# Altium PCB AUX_SteeringWheel_v5.PcbDoc
Units mil, origin at the board's own origin, x right, y up, seen from the top; angles counter-clockwise.
Board outline 6882 x 5290 mil, 2 copper layers (Top Layer, Bottom Layer); 43 components, 42 nets, 261 pads, 56 vias.
Unrouted connection lines stored in the file: 1.
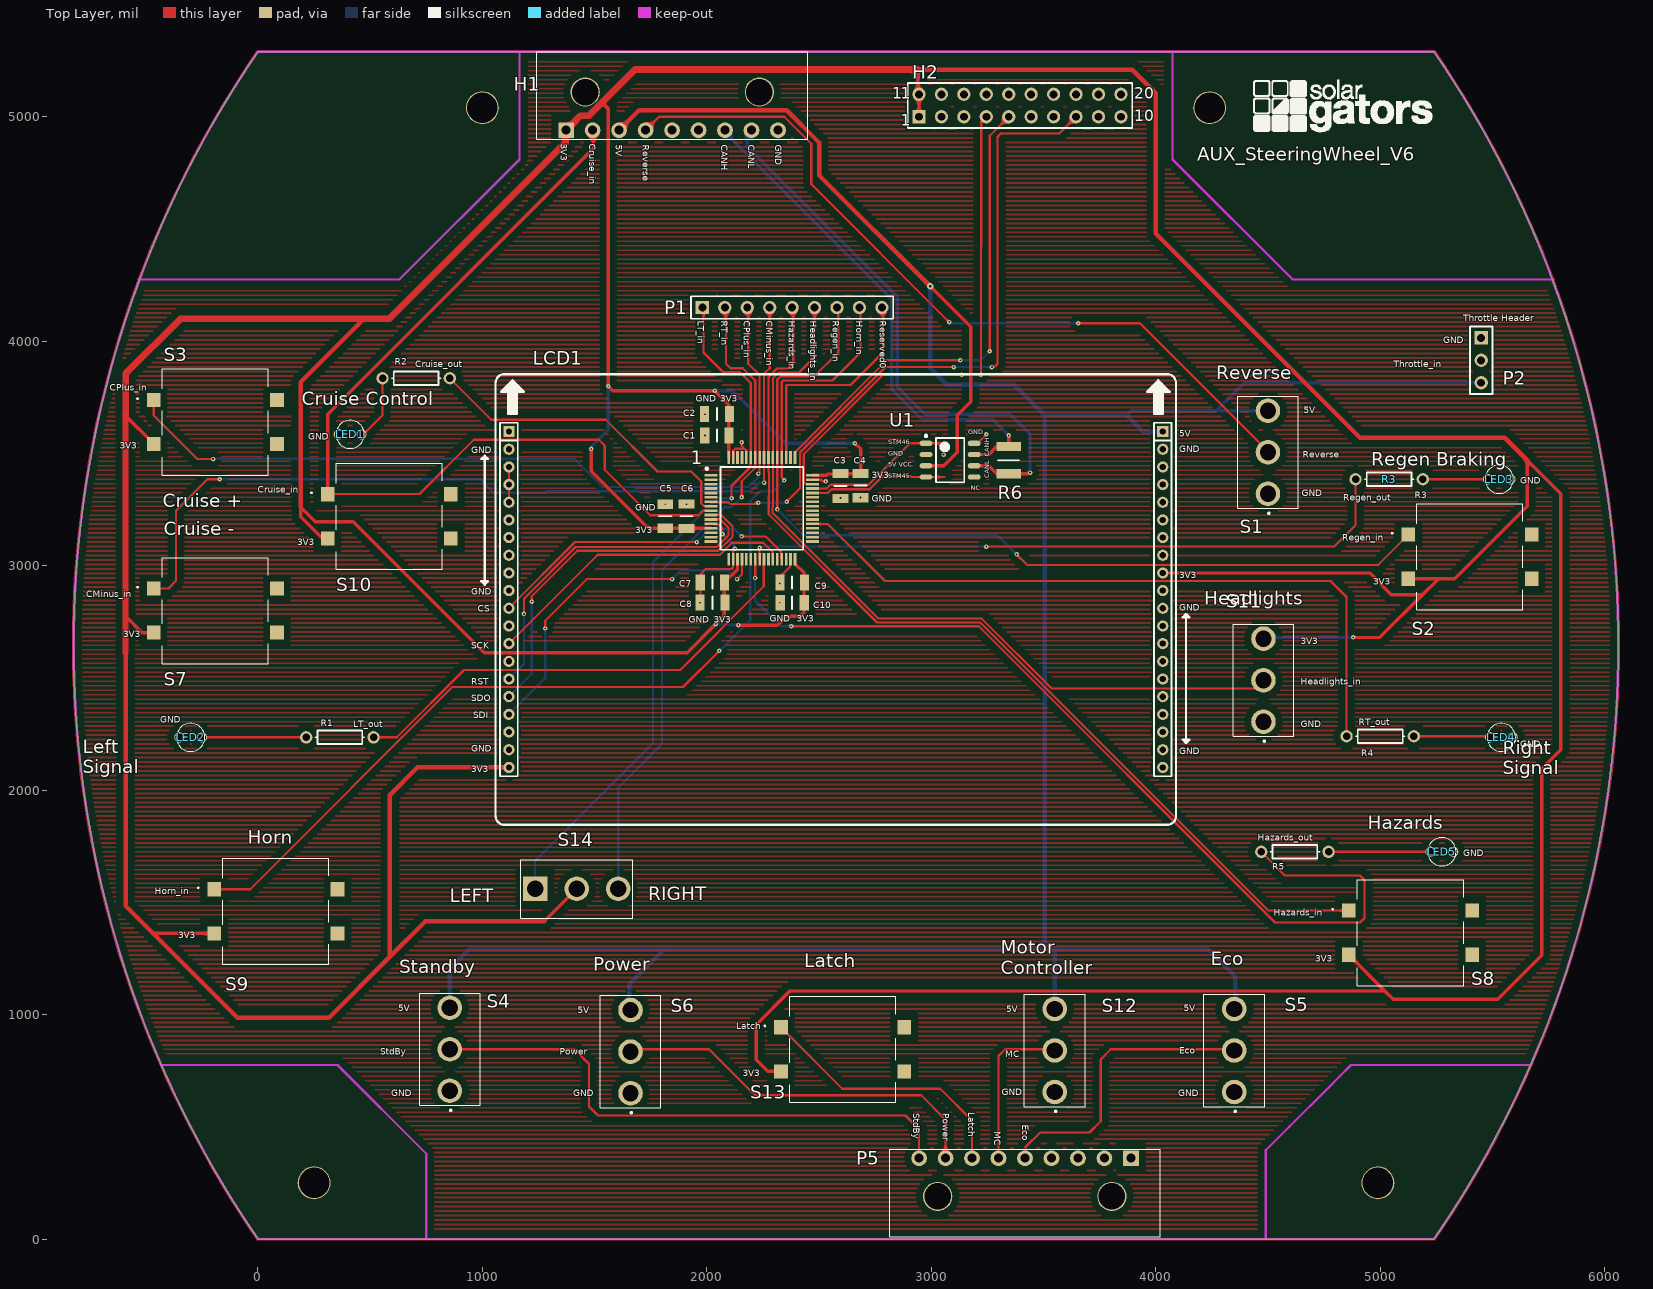
[diagram p0: Top Layer view]
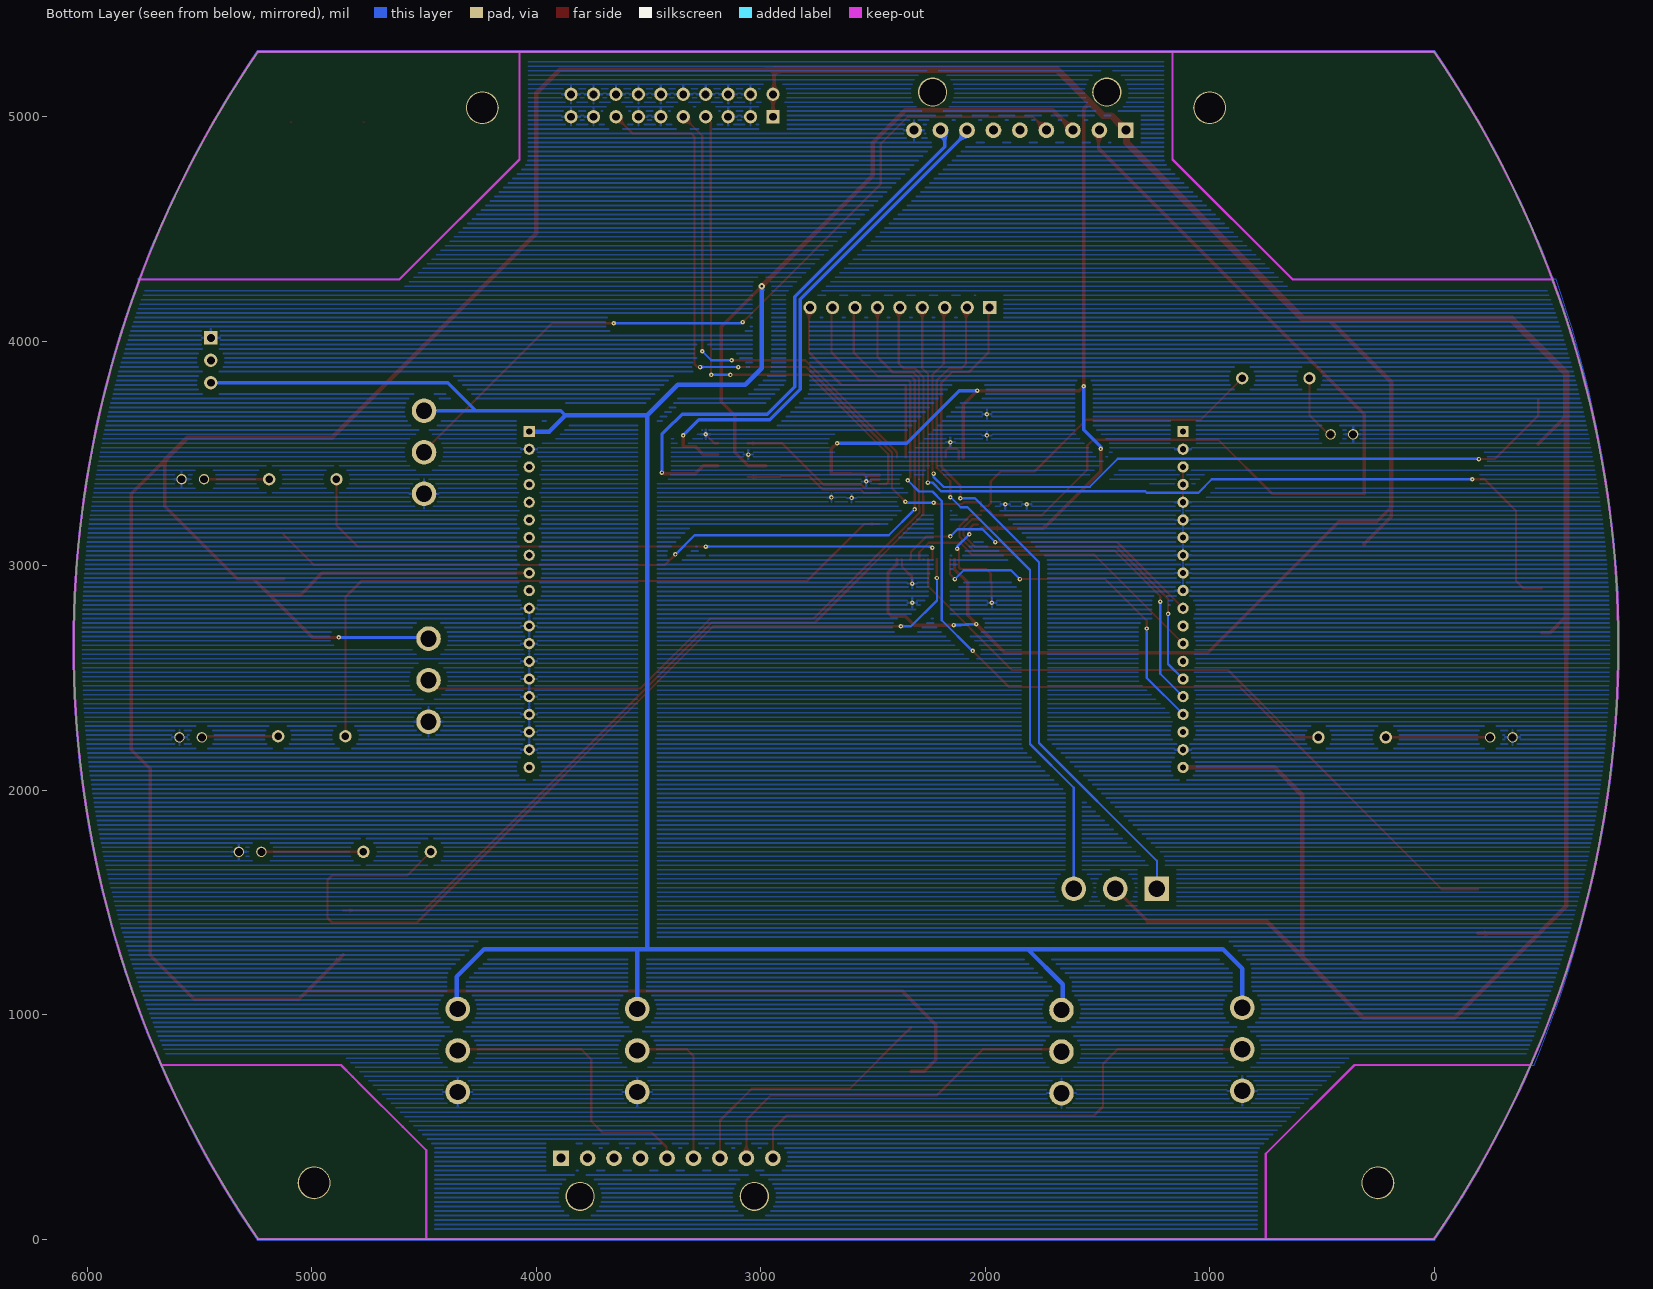
[diagram p1: Bottom Layer view, seen from below]

## Layer stack, top to bottom
Top Solder: solder mask 1, SM-001, Dk 4
Top Layer: signal copper 1.4
Dielectric 1: dielectric 12.6, FR-4, Dk 4.8
Bottom Layer: signal copper 1.4
Bottom Solder: solder mask 1, SM-001, Dk 4

## Board outline
0,0 5240,0 5239.83,0.12 ccw(c1391,2645) 5239.83,5289.88 5240,5290 0.25,5290 ccw(c3849,2645)

## Design rules (kind name [scope] priority, off if disabled: settings)
Clearance "Transciever Clearance" [InComponent('U1')] p1: gap=7 ignorepadtopadclearanceinfootprint=FALSE except(6: Arc-SMDPad Arc-THPad Track-SMDPad Track-THPad; 25: SMDPad-Fill SMDPad-Poly SMDPad-Region)
Clearance "General Clearance" [Not InComponent('1') and Not InComponent('U1') vs Not InComponent('1') and Not InComponent('U1')] p2: gap=7 ignorepadtopadclearanceinfootprint=TRUE except(6: Arc-SMDPad Arc-THPad Track-SMDPad Track-THPad; 15: Via-Fill Via-Poly Via-Region; 30: Arc-Fill Arc-Poly Arc-Region Track-Fill Track-Poly Track-Region SMDPad-Fill SMDPad-Poly SMDPad-Region THPad-Fill THPad-Poly THPad-Region Fill-Fill Fill-Poly Fill-Region Poly-Poly Poly-Region Region-Region)
Clearance "STM Clearance" [InComponent('1')] p3: gap=7 ignorepadtopadclearanceinfootprint=FALSE except(6: Arc-SMDPad Arc-THPad Track-SMDPad Track-THPad; 15: Via-Fill Via-Poly Via-Region)
ComponentClearance [InComponent('U2')] p1: gap=0 collisioncheckmode=3 verticalgap=10 showdistances=FALSE
DiffPairsRouting [All] p1: maxlimit=10 minlimit=10 mostfreqgap=10 toplayer_minwidth=15 toplayer_maxwidth=15 toplayer_prefwidth=15 bottomlayer_minwidth=15 bottomlayer_maxwidth=15 bottomlayer_prefwidth=15 maxuncoupledlength=500
Height [All] p1: minheight=0 maxheight=2000 prefheight=500
HoleSize [All] p1: absolutevalues=TRUE maxlimit=200 minlimit=1 maxpercent=80.000 minpercent=20.000
PolygonConnect [InNet('GND') vs InNet('GND')] p1: connectstyle=Relief reliefconductorwidth=10 reliefentries=4 polygonreliefangle="90 Angle" airgapwidth=10
RoutingVias [All] p1: holewidth=28 width=50 viastyle="Through Hole" minholewidth=28 minwidth=50 maxholewidth=28 maxwidth=50
SolderMaskExpansion [All] p1: expansion=4
Width [All] p1: maxlimit=30 minlimit=10 preferedwidth=10 bottomlayer_maxwidth=20 minimp=50.000000 maximp=50.000000 favimp=50.000000
26 further rules are at their usual default settings.

## Classes and differential pairs
differential pair CAN: +CAN_P -CAN_N

## Components (designator, comment, footprint, x,y, rotation, side; value= is the part's Value field where it differs from the comment)
1 "STM32F072RBT6" QFP50P1200X1200X160-64N 2245,3255 r0 top
C1 "Cap Semi" CAPC3216X90N 2045,3580 r180 top value=4.7uF
C2 "Cap Semi" CAPC3216X88N 2045,3675 r180 top value=100nF
C3 "Cap Semi" CAPC3216X88N 2595,3355 r90 top value=100nF
C4 "Cap Semi" CAPC3216X90N 2685,3356.85 r90 top value=4.7uF
C5 "Cap Semi" CAPC3216X90N 1815,3220 r90 top value=4.7uF
C6 "Cap Semi" CAPC3216X88N 1910,3220 r90 top value=100nF
C7 "Cap Semi" CAPC3216X90N 2025,2925 r180 top value=4.7uF
C8 "Cap Semi" CAPC3216X88N 2025,2835 r180 top value=100nF
C9 "Cap Semi" CAPC3216X88N 2380,2925 r0 top value=100nF
C10 "Cap Semi" CAPC3216X90N 2380,2835 r0 top value=4.7uF
H1 "9-Pin Connector" Rt_Angle_9-Pin 1242.5,4900 r0 top
H2 "Header 10X2A" HDR2X10_CEN 2945,5000 r0 top
LCD1 "HY28B" HY28B 1120,3597.36 r0 top locked
LED1 "SML-LXIL0603SIC-TR" "LED thru hole" 460.59,3585 r90 top locked
LED2 "SML-LXIL0603SIC-TR" "LED thru hole" -250,2235 r90 top locked
LED3 "SML-LXIL0603SIC-TR" "LED thru hole" 5480,3385 r270 top locked
LED4 "SML-LXIL0603SIC-TR" "LED thru hole" 5490,2235 r270 top locked
LED5 "SML-LXIL0603SIC-TR" "LED thru hole" 5225,1725 r270 top locked
P1 "Header 9" HDR1X9 1980,4150 r0 top
P2 "Header 3" HDR1X3 5450,4015 r270 top
P5 "Header 9" Rt_Angle_9-Pin 4020,400 r180 top locked
R1 "Res1" AXIAL-0.3 365,2235 r180 top value=1K
R2 "Res1" AXIAL-0.3 705,3835 r180 top value=1K
R3 "Res1" AXIAL-0.3 5040,3385 r0 top value=1K
R4 "Res1" AXIAL-0.3 5000,2240 r0 top value=1K
R5 "Res1" AXIAL-0.3 4620,1725 r0 top value=1K
R6 "SG73P2ETTD1200F" RESC3226X70N 3345,3470 r270 top
S1 "Switch" 100SP1T1B4M2QE 4500,3505 r90 top
S2 "101-0624-EV" 1010624EV 5400,3040 r0 top
S3 "101-0624-EV" 1010624EV -190,3640 r0 top locked
S4 "Switch" 100SP1T1B4M2QE 855,845.04 r90 top
S5 "Switch" 100SP1T1B4M2QE 4350,840 r90 top
S6 "Switch" 100SP1T1B4M2QE 1660,835 r90 top
S7 "101-0624-EV" 1010624EV -190,2800 r0 top locked
S8 "101-0624-EV" 1010624EV 5135,1365 r0 top
S9 "101-0624-EV" 1010624EV 80,1460 r0 top locked
S10 "101-0624-EV" 1010624EV 585,3220 r0 top locked
S11 "Switch" 100SP1T1B4M2QE 4480,2490 r90 top
S12 "Switch" 100SP1T1B4M2QE 3550,840.04 r90 top
S13 "101-0624-EV" 1010624EV 2605,845 r0 top locked
S14 "2M1-SP3-T1-B1-M2QE" 2M1SP3T1B1M2QE 1234.96,1560 r0 top
U1 "IC CAN TRANSCEIVER" "CAN TRANSCEIVER" 3083.61,3470 r0 top

## Footprints (in the part's own frame and the unit in brackets; to place one, negate y for a bottom-side part, rotate by r counter-clockwise, add the part's x,y. Pads: shape width x height; smd on the part's side, far side on the other; paste and mask are expansions set on the pad)
2M1SP3T1B1M2QE [mm]
  rect 2.775x2.775 hole 1.85: 1(0,0)
  round 2.775 hole 1.85: 2(4.7,0) 3(9.4,0)
  silkscreen extent -1.65,-3.3 11.05,3.3, body extent -1.65,-3.3 11.05,3.3, height 28.3
100SP1T1B4M2QE [mm]
  round 2.775 hole 1.85: 1(-4.7,0) 2(0,0) 3(4.7,0)
  silkscreen extent -7,-3.43 6.35,3.43, body extent -6.35,-3.43 6.35,3.43, height 28.1
1010624EV [mm]
  rect 1.55x1.6 smd: T1(-6.975,2.5) T2(6.975,2.5) T3(-6.975,-2.5) T4(6.975,-2.5)
  silkscreen extent -8.85,-6 6,6
AXIAL-0.3 [mm] "Axial Device, Thru-Hole; 2 Leads; 0.3 in Pin Spacing"
  round 1.4 hole 0.85: 1(-3.81,0) 2(3.81,0)
  silkscreen extent -2.77,-0.76 2.77,0.76
"CAN TRANSCEIVER" [mm] "SOIC, 8-Leads, Body 4.91x3.90mm, Pitch 1.27mm, IPC Medium Density"
  oval 1.45x0.6 smd: 1(-2.725,1.905) 2(-2.725,0.635) 3(-2.725,-0.635) 4(-2.725,-1.905) 5(2.725,-1.905) 6(2.725,-0.635) 7(2.725,0.635) 8(2.725,1.905)
  silkscreen extent -2.85,-2.5 1.6,2.88, body extent -2,-2.5 2,2.5, height 1.75
CAPC3216X88N [mm]
  rect 1.02x1.82 smd: 1(-1.4,0) 2(1.4,0)
  silkscreen extent 0,-0.7 0,0.7, body extent -1.6,-0.8 1.6,0.8, height 0.88
CAPC3216X90N [mm]
  rect 1.06x1.78 smd: 1(-1.36,0) 2(1.36,0)
  silkscreen extent 0,-0.7 0,0.7, body extent -1.6,-0.8 1.6,0.8, height 0.9
HDR1X3 [mm] "Connector; Header; 3 Position"
  rect 1.5x1.5 hole 0.9: 1(0,0)
  round 1.5 hole 0.9: 2(2.54,0) 3(5.08,0)
  silkscreen extent -1.27,-1.27 6.35,1.27
HDR1X9 [mm] "Connector; Header; 9 Position"
  rect 1.5x1.5 hole 0.9: 1(0,0)
  round 1.5 hole 0.9: 2(2.54,0) 3(5.08,0) 4(7.62,0) 5(10.16,0) 6(12.7,0) 7(15.24,0) 8(17.78,0) 9(20.32,0)
  silkscreen extent -1.27,-1.27 21.59,1.27
HDR2X10_CEN [mm] "Connector; Header; 10x2 Position"
  rect 1.5x1.5 hole 0.9: 1(0,0)
  round 1.5 hole 0.9: 2(2.54,0) 3(5.08,0) 4(7.62,0) 5(10.16,0) 6(12.7,0) 7(15.24,0) 8(17.78,0) 9(20.32,0) 10(22.86,0) 11(0,2.54) 12(2.54,2.54) 13(5.08,2.54) 14(7.62,2.54) 15(10.16,2.54) 16(12.7,2.54) 17(15.24,2.54) 18(17.78,2.54) 19(20.32,2.54) 20(22.86,2.54)
  silkscreen extent -1.27,-1.27 24.13,3.81
HY28B [mm] "2.8\" LCD"
  rect 1.27x1.27 hole 0.7: 1(-0.051,0) 21(73.949,0)
  round 1.27 hole 0.7: 2(-0.051,-2) 3(-0.051,-4) 4(-0.051,-6) 5(-0.051,-8) 6(-0.051,-10) 7(-0.051,-12) 8(-0.051,-14) 9(-0.051,-16) 10(-0.051,-18) 11(-0.051,-20) 12(-0.051,-22) 13(-0.051,-24) 14(-0.051,-26) 15(-0.051,-28) 16(-0.051,-30) 17(-0.051,-32) 18(-0.051,-34) 19(-0.051,-36) 20(-0.051,-38) 22(73.949,-2) 23(73.949,-4) 24(73.949,-6) 25(73.949,-8) 26(73.949,-10) 27(73.949,-12) 28(73.949,-14) 29(73.949,-16) 30(73.949,-18) 31(73.949,-20) 32(73.949,-22) 33(73.949,-24) 34(73.949,-26) 35(73.949,-28) 36(73.949,-30) 37(73.949,-32) 38(73.949,-34) 39(73.949,-36) 40(73.949,-38)
  silkscreen extent -1.55,-44.5 75.45,6.5
"LED thru hole" [mil] "WP710A10QBC/D or WP7113LVBC/D"
  round 46 hole 35.43: 1(0,0) 2(0,100)
  silkscreen extent -63,-13 63,113
QFP50P1200X1200X160-64N [mm]
  rect 1.45x0.3 smd: 1(-5.75,3.75) 2(-5.75,3.25) 3(-5.75,2.75) 4(-5.75,2.25) 5(-5.75,1.75) 6(-5.75,1.25) 7(-5.75,0.75) 8(-5.75,0.25) 9(-5.75,-0.25) 10(-5.75,-0.75) 11(-5.75,-1.25) 12(-5.75,-1.75) 13(-5.75,-2.25) 14(-5.75,-2.75) 15(-5.75,-3.25) 16(-5.75,-3.75) 33(5.75,-3.75) 34(5.75,-3.25) 35(5.75,-2.75) 36(5.75,-2.25) 37(5.75,-1.75) 38(5.75,-1.25) 39(5.75,-0.75) 40(5.75,-0.25) 41(5.75,0.25) 42(5.75,0.75) 43(5.75,1.25) 44(5.75,1.75) 45(5.75,2.25) 46(5.75,2.75) 47(5.75,3.25) 48(5.75,3.75)
  rect 0.3x1.45 smd: 17(-3.75,-5.75) 18(-3.25,-5.75) 19(-2.75,-5.75) 20(-2.25,-5.75) 21(-1.75,-5.75) 22(-1.25,-5.75) 23(-0.75,-5.75) 24(-0.25,-5.75) 25(0.25,-5.75) 26(0.75,-5.75) 27(1.25,-5.75) 28(1.75,-5.75) 29(2.25,-5.75) 30(2.75,-5.75) 31(3.25,-5.75) 32(3.75,-5.75) 49(3.75,5.75) 50(3.25,5.75) 51(2.75,5.75) 52(2.25,5.75) 53(1.75,5.75) 54(1.25,5.75) 55(0.75,5.75) 56(0.25,5.75) 57(-0.25,5.75) 58(-0.75,5.75) 59(-1.25,5.75) 60(-1.75,5.75) 61(-2.25,5.75) 62(-2.75,5.75) 63(-3.25,5.75) 64(-3.75,5.75)
  silkscreen extent -6.35,-4.68 4.68,4.68, body extent -6,-6 6,6, height 1.6
RESC3226X70N [mm]
  rect 1.05x2.8 smd: 1(-1.55,0) 2(1.55,0)
  silkscreen extent 0,-1.2 0,1.2, body extent -1.6,-1.3 1.6,1.3, height 0.7
Rt_Angle_9-Pin [mil]
  rect 70x70 hole 40: 1(130.5,40)
  round 70 hole 40: 2(248.5,40) 3(366.5,40) 4(484.5,40) 5(602.5,40) 6(720.5,40) 7(838.5,40) 8(956.5,40) 9(1074.5,40)
  round 130 hole 118: P$1(215.5,210) P$2(991.5,210)
  silkscreen extent 0,0 1206,390

## Part data
1: "Integrated Circuit", Manufacturer_Name=STMicroelectronics, Mouser Part Number=511-STM32F072RBT6, Datasheet Link=https://componentsearchengine.com/Datasheets/1/STM32F072RBT6.pdf, Height=1.6mm, Manufacturer_Part_Number=STM32F072RBT6, Mouser Price/Stock=https://www.mouser.com/Search/Refine.aspx?Keyword=511-STM32F072RBT6
C1 C4 C5 C7 C10: library part 1206X475K250CT, "1206X475K250CT", Manufacturer_Name="Walsin Technology Corporation", Datasheet Link=https://ms.componentsearchengine.com/Datasheets/2/1206X475K250CT.pdf, Height=0.9mm, Manufacturer_Part_Number=1206X475K250CT
C2 C3 C6 C8 C9: library part C1206C104K5RAC7411, "C1206C104K5RAC7411", Manufacturer_Name=Kemet, Datasheet Link=https://ms.componentsearchengine.com/Datasheets/1/C1206C104K5RAC7411.pdf, Height=0.88mm, Manufacturer_Part_Number=C1206C104K5RAC7411
H2: "Header, 10-Pin, Dual row", LatestRevisionDate=17-Jul-2002, LatestRevisionNote="Re-released for DXP Platform.", Publisher="Altium Limited"
LCD1: "2.8\" LCD"
LED1 LED2 LED4: "Cruise", Manufacturer_Name=Lumex, Mouser2 Part Number=696-SMLLXIL0603SICTR, ComponentLink1Description=Red, ComponentLink1URL=https://www.mouser.com/ProductDetail/Lumex/SML-LXIL0603SIC-TR?qs=sGAEpiMZZMseGfSY3csMkdgyOOAg6kv2wBhnt1KKZ0Ir1Jo46E1V3Q%3D%3D, ComponentLink2Description=Green, ComponentLink2URL=https://www.mouser.com/ProductDetail/Lumex/SML-LXIL0603UPGCTR?qs=sGAEpiMZZMseGfSY3csMkdgyOOAg6kv2sRjHcnaWQfp%2F9Np9qK5zmw%3D%3D, ComponentLink3Description=Blue, ComponentLink3URL=https://www.mouser.com/ProductDetail/Lumex/SML-LXIL0603USBCTR?qs=sGAEpiMZZMseGfSY3csMkdgyOOAg6kv2YTCj%2FpdrnHQXx1e9lymIRQ%3D%3D, Datasheet Link=https://componentsearchengine.com/Datasheets/1/SML-LXIL0603SIC-TR.pdf, Height=1.15mm, Manufacturer_Part_Number=SML-LXIL0603SIC-TR, Mouser2 Price/Stock=https://www.mouser.com/Search/Refine.aspx?Keyword=696-SMLLXIL0603SICTR
LED3: "Headlights", Manufacturer_Name=Lumex, Mouser2 Part Number=696-SMLLXIL0603SICTR, ComponentLink1Description=Red, ComponentLink1URL=https://www.mouser.com/ProductDetail/Lumex/SML-LXIL0603SIC-TR?qs=sGAEpiMZZMseGfSY3csMkdgyOOAg6kv2wBhnt1KKZ0Ir1Jo46E1V3Q%3D%3D, ComponentLink2Description=Green, ComponentLink2URL=https://www.mouser.com/ProductDetail/Lumex/SML-LXIL0603UPGCTR?qs=sGAEpiMZZMseGfSY3csMkdgyOOAg6kv2sRjHcnaWQfp%2F9Np9qK5zmw%3D%3D, ComponentLink3Description=Blue, ComponentLink3URL=https://www.mouser.com/ProductDetail/Lumex/SML-LXIL0603USBCTR?qs=sGAEpiMZZMseGfSY3csMkdgyOOAg6kv2YTCj%2FpdrnHQXx1e9lymIRQ%3D%3D, Datasheet Link=https://componentsearchengine.com/Datasheets/1/SML-LXIL0603SIC-TR.pdf, Height=1.15mm, Manufacturer_Part_Number=SML-LXIL0603SIC-TR, Mouser2 Price/Stock=https://www.mouser.com/Search/Refine.aspx?Keyword=696-SMLLXIL0603SICTR
LED5: "Hazards", Manufacturer_Name=Lumex, Mouser2 Part Number=696-SMLLXIL0603SICTR, ComponentLink1Description=Red, ComponentLink1URL=https://www.mouser.com/ProductDetail/Lumex/SML-LXIL0603SIC-TR?qs=sGAEpiMZZMseGfSY3csMkdgyOOAg6kv2wBhnt1KKZ0Ir1Jo46E1V3Q%3D%3D, ComponentLink2Description=Green, ComponentLink2URL=https://www.mouser.com/ProductDetail/Lumex/SML-LXIL0603UPGCTR?qs=sGAEpiMZZMseGfSY3csMkdgyOOAg6kv2sRjHcnaWQfp%2F9Np9qK5zmw%3D%3D, ComponentLink3Description=Blue, ComponentLink3URL=https://www.mouser.com/ProductDetail/Lumex/SML-LXIL0603USBCTR?qs=sGAEpiMZZMseGfSY3csMkdgyOOAg6kv2YTCj%2FpdrnHQXx1e9lymIRQ%3D%3D, Datasheet Link=https://componentsearchengine.com/Datasheets/1/SML-LXIL0603SIC-TR.pdf, Height=1.15mm, Manufacturer_Part_Number=SML-LXIL0603SIC-TR, Mouser2 Price/Stock=https://www.mouser.com/Search/Refine.aspx?Keyword=696-SMLLXIL0603SICTR
P1 P5: "Header, 9-Pin", LatestRevisionDate=17-Jul-2002, LatestRevisionNote="Re-released for DXP Platform.", Publisher="Altium Limited"
P2: "Header, 3-Pin", LatestRevisionDate=17-Jul-2002, LatestRevisionNote="Re-released for DXP Platform.", Publisher="Altium Limited"
R1 R2 R3 R4 R5: "Resistor", LatestRevisionDate=17-Jul-2002, LatestRevisionNote="Re-released for DXP Platform.", PackageDescription="Axial Device, Thru-Hole; 2 Leads; 0.3 in Pin Spacing", PackageReference=AXIAL-0.3, Published=8-Jun-2000, Publisher="Altium Limited"
R6: "Resistor", Manufacturer_Name="KOA Speer", Datasheet Link=https://ms.componentsearchengine.com/Datasheets/1/SG73P2ETTD1200F.pdf, Height=0.7mm, Manufacturer_Part_Number=SG73P2ETTD1200F
S1 S4 S5 S6 S11 S12: library part 100SP1T1B1M2QEH, Manufacturer_Name=E-Switch, Mouser2 Part Number=612-100-A1121, Datasheet Link=https://componentsearchengine.com//100SP1T1B1M2QEH.pdf, Height=28mm, Manufacturer_Part_Number=100SP1T1B1M2QEH, Mouser2 Price/Stock=https://www.mouser.com/Search/Refine.aspx?Keyword=612-100-A1121
S2 S3 S7 S8 S9 S10 S13: "Switch", Manufacturer_Name="Mountain Switch", Datasheet Link=https://componentsearchengine.com/Datasheets/1/101-0624-EV.pdf, Height=7.3mm, Manufacturer_Part_Number=101-0624-EV, Mouser Part Number=101-0624-EV, Mouser Price/Stock=https://www.mouser.com/Search/Refine.aspx?Keyword=101-0624-EV
S14: "Switch", Manufacturer_Name="Carling Technologies", Mouser2 Part Number=691-2M1-SP3-T1B1M2QE, Datasheet Link=https://www.carlingtech.com/sites/default/files/documents/Carling-MTS-2M-Series.pdf, Height=28.2mm, Manufacturer_Part_Number=2M1-SP3-T1-B1-M2QE, Mouser2 Price/Stock=https://www.mouser.com/Search/Refine.aspx?Keyword=691-2M1-SP3-T1B1M2QE
U1: library part "CAN TRANSCEIVER"

## Free pads (board coordinates)
  round 146 hole 136: P$3(1000,5040) P$4(4240,5040) P$5(4990,250) P$6(250,250)

## Via types
v1: diameter 20, hole 8, Top Layer to Bottom Layer, 49 vias
v2: diameter 20, hole 7.87, Top Layer to Bottom Layer, 6 vias
v3: diameter 30, hole 10, Top Layer to Bottom Layer, 1 vias

## Nets (pads, with @x,y where several pads share a name; then routed paths per layer and width w, separated by ;. In a path a pad name is that pad's centre, name@x,y a point inside that pad or via, vN(x,y) a via of type N, cw(c..) or ccw(c..) an arc to the next point about the centre after c; other vN are vias at no path point)
3V3: 1.13 1.19 1.32 1.48 1.64 C1.1 C2.1 C3.2 C4.2 C5.1 C6.1 C7.1 C8.1 C9.2 C10.2 H1.1 H2.1 H2.11 LCD1.20 LCD1.29 S2.T3 S3.T3 S7.T3 S8.T3 S9.T3 S10.T3 S11.3 S13.T3 S14.2 | length 32827.3
  Top Layer w13: 2136.73,2983.79 1.19
  Top Layer w15: -590,3667.95 -464.61,3542.56 S3.T3 ; -585,2770 -516.57,2701.57 S7.T3@-479.61,2701.57 ; -465,1360 -463.43,1361.57 S9.T3 ; 187.5,3262.5 190,3260 ; S10.T3@310.39,3097.56 190,3217.95 190,3260 ; 1275,1415 S14.2 ; v1(1485,3520) 1485,3420 1730,3175 1735,3175 1743.15,3166.85 1910,3166.85 1910.22,3166.63 2018.41,3166.63 1.13 ; 1533.01,5063.38 1560.5,5035.89 v1(1560.5,3799.5) 1580,3780 v1(2035,3780) 2097.89,3717.11 C2.1@2097.89,3687.07 ; 1.64 2097.64,3481.66 C1.1@2097.64,3569.49 ; C2.1@2097.89,3675.26 2098.15,3675 C1.1@2098.15,3580 ; 2136.73,2983.79 2078.15,2925.2 2078.15,2778.15 v1(2040,2740) 1912.24,2612.24 1007.76,2612.24 425,3195 255,3195 190,3260 ; v1(2140,2735) 2315,2735 2355,2775 2415,2775 2433.15,2793.15 2433.15,2968.66 2392.64,3009.17 1.32 ; S13.T3 2330.39,747.56 2271.23,747.56 2220,798.79 2220,955 2370,1105 5020.98,1105 ; 1.48 2533.52,3402.64 2539.04,3408.15 2595,3408.15 2595.93,3409.07 2684.07,3409.07 2685,3410 C4.2 2685,3520 v1(2660,3545) ; 2940,5210 2940,5105 H2.11 H2.1 ; LCD1.29 4952.56,2967.44 5050,2870 5188.43,2870 ; S8.T3 4860.39,1265.59 5020.98,1105 ; v1(4880,2680.08) 4998.51,2680.08 5188.43,2870 ; S2.T3 5260,2941.57 ; 5020.98,1105 5057.82,1068.17 5523.17,1068.17 5720,1265 5720,2095 5805,2180 5805,3320 5655,3470 5655,3265 5331.57,2941.57 5260,2941.57 ; 5188.43,2870 5260,2941.57
  Top Layer w20: -590,2610 -590,1485 -465,1360 -90,985 230,985 315,985 587.5,1257.5 ; 190,3260 190,3800 189.78,3800.22 189.78,3816.78 472.5,4099.5 ; S10.T3@310.39,3096.57 S10.T3@310.39,3097.56 ; LCD1.20 711.3,2101.3 587.5,1977.5 587.5,1257.5 ; 1275,1415 745,1415 587.5,1257.5 ; C2.1@2097.89,3675.26 C2.1@2097.89,3687.07 ; 2940,5210 3895,5210 4000,5105 4000,4480 4910,3570 5555,3570 5655,3470
  Top Layer w25: -590,2610 -590,3667.95
  Top Layer w30: -590,3667.95 -589.5,3668.45 -589.5,3855.5 -345.5,4099.5 472.5,4099.5 584.5,4099.5 1370,4885 1370,4937 H1.1 1438,5005 1474.62,5005 1533.01,5063.38 1679.62,5210 2700,5210 2940,5210
  Bottom Layer w15: v1(1485,3520) 1485,3530 1560,3605 1560,3799 v1(1560.5,3799.5) ; v1(2035,3780) 2115,3780 2350,3545 v1(2660,3545) ; v1(2040,2740) v1(2140,2735) ; S11.3@4480,2680.08 v1(4880,2680.08)
5V: H1.3 LCD1.21 P2.3 S1.3 S4.3 S5.3 S6.3 S12.3 U1.3 | length 13102.9
  Top Layer w15: U1.3 3055,3445 3115,3505 3115,3670 3175,3730 3175,4065 v3(2995,4245)
  Top Layer w20: H1.3 1699,5030 2027,5030 2028,5029 2356,5029 2500,4885 2500,4740 v3(2995,4245)
  Bottom Layer w15: 3870,3670 3890.04,3690.04 4270,3690.04 ; S1.3 S1.3@4495,3690.04 ; S1.3@4500,3695.04 S1.3@4495,3690.04 ; P2.3 4394.96,3815 4270,3690.04 ; 4270,3690.04 S1.3@4495,3690.04
  Bottom Layer w20: S4.3 855,1205 941.72,1291.72 1811.72,1291.72 ; S6.3@1655,1030.08 1655,1135 1811.72,1291.72 ; v3(2995,4245) 2995,3880 3069,3806 3369.08,3806 3505.08,3670 ; 3490.08,1291.8 3490,1291.72 ; S12.3@3555,1030.08 3550,1035.08 3550,1291.72 ; LCD1.21 3942.64,3597.36 3870,3670 3505.08,3670 ; S5.3@4355,1030.08 4355,1168.43 4231.72,1291.72 3550,1291.72 ; 1811.72,1291.72 3490,1291.72 ; 3490,1291.72 3510,1291.72 ; 3505.08,3670 3505.08,1296.64 3510,1291.72 ; 3510,1291.72 3550,1291.72
CAN_N: H1.8 R6.2 U1.6 | length 2551
  Top Layer w15: U1.6 3255,3445 3291.02,3408.98 R6.2 3345.51,3409.49 3429.49,3409.49 3435,3415 v1(3440,3415)
  Bottom Layer w15: H1.8 2187.22,4940 2180,4932.78 2180,4865.36 2848.03,4197.33 2848.03,3796.97 2970,3675 3350.36,3675 3422.5,3602.86 3422.5,3602.5 3440,3585 v1(3440,3415)
CAN_P: H1.7 R6.1 U1.7 | length 2296.7
  Top Layer w15: U1.7 3255,3495 3291.02,3531.02 R6.1 v1(3345,3580)
  Bottom Layer w15: H1.7 2092.78,4940 2092.78,4917.22 2823.03,4186.97 2823.03,3786.62 2959.64,3650 3275,3650 v1(3345,3580) v1@3347.5,3577.5
CMinus_in: 1.56 P1.4 S7.T1 | length 3953.2
  Top Layer w10: S7.T1@-479.61,2898.43 S7.T1 -398.88,2898.43 -365,2932.3 -365,3245 -225,3385 v2(-170,3385) ; v2(2255,3370) 2255,3420 2254.84,3420.16 1.56 2254.84,3854.84 2280,3880 P1.4
  Bottom Layer w10: v2(-170,3385) 990,3385 1049.86,3325.14 1280.14,3325.14 1287,3332 2197,3332 2235,3370 v2(2255,3370)
CPlus_in: 1.57 P1.3 S3.T1 | length 3694.5
  Top Layer w10: S3.T1 -464.61,3669.35 -270.26,3475 v2(-200,3475) ; P1.3 2185,4145 2185,3900 2235.16,3849.84 1.57 2235.16,3415.16 v2(2230,3410)
  Bottom Layer w10: v2(-200,3475) -199.12,3475.88 1409.12,3475.88 1534,3351 2186,3351 2230,3395 v2(2230,3410)
Cruise_in: 1.9 H1.2 S10.T1 | length 4133.8
  Top Layer w10: S10.T1 310.39,3319.41 719.41,3319.41 961.36,3561.36 1518.64,3561.36 1545,3535 1545,3427.36 1747.36,3225 1961.98,3225 1983.04,3246.06 2017.72,3246.06 1.9 ; H1.2 H1.2@1495,4936
  Top Layer w15: S10.T1@310.39,3319.41 310.39,3675.39 1495,4860 H1.2@1495,4936
Cruise_out: 1.8 R2.1 | length 1459.1
  Top Layer w10: R2.1 1040,3650 1550,3650 1780,3420 1930,3420 1975,3375 1975,3278.14 1987.4,3265.75 1.8@2016.81,3265.75 ; 1.8@2018.62,3263.94 1.8@2016.81,3265.75 ; 1.8 2017.72,3265.75 1.8@2016.81,3265.75
Eco: P5.5 S5.2 | length 1327.3
  Top Layer w10: P5.5 3420,362.5 3420,410 3485,475 3705,475 3755,525 3755,800 3800.04,845.04 S5.2@4355,845.04
GND: 1.12 1.18 1.31 1.47 1.60 1.63 C1.2 C2.2 C3.1 C4.1 C5.2 C6.2 C7.2 C8.2 C9.1 C10.1 H1.9 H2.2 H2.3 H2.6 H2.7 H2.9 H2.10 H2.12 H2.13 H2.14 H2.15 H2.16 H2.17 H2.18 H2.19 H2.20 LCD1.2 LCD1.3 LCD1.4 LCD1.5 LCD1.6 LCD1.7 LCD1.8 LCD1.9 LCD1.10 LCD1.19 LCD1.22 LCD1.31 LCD1.32 LCD1.33 LCD1.34 LCD1.35 LCD1.36 LCD1.37 LCD1.38 LCD1.39 LED1.2 LED2.2 LED3.2 LED4.2 LED5.2 P2.1 S1.1 S4.1 S5.1 S6.1 S11.1 S12.1 U1.2 U1.8 | length 1113.1
  Top Layer w10: LCD1.5 LCD1.4 LCD1.3 ; C8.2@1971.85,2835 1971.85,2925 1975,2928.15 1975,2965 1995,2985 2110,2985 2117.05,2992.05 1.18 2117.05,3067.05 v1(2125,3075) ; 1.12@2032.19,3183.32 2051.72,3183.32 2070,3165.05 v1(2070,3140) ; 1.63@2117.14,3476.11 2117.14,3511.79 2126.27,3520.92 2166.88,3520.92 ; v1(2155,3550) 2155,3532.8 2166.88,3520.92 ; 1.60 2175.2,3482.28 2175.2,3514.8 2173,3514.8 2166.88,3520.92 ; C9.1@2326.85,2925 2326.85,2952.2 2370.17,2995.52 2370.17,3025.84 1.31 ; 1.47 2509.34,3382.95 2517.29,3375 v1(2530,3375) ; v1(3055.05,3495) v1@3057.72,3495 ; U1.8 3206.31,3545 3245,3583.69 v1(3245,3585)
  Bottom Layer w10: v1(2070,3140) 2125,3085 v1(2125,3075)
  other v1: 1970,2835 2325,2835 2325,2920 1815,3273.15 1910,3273.15 2595,3301.85 2685,3303.7 1991.85,3580 1991.85,3675
Hazards_in: 1.55 P1.5 S8.T1 | length 4315.2
  Top Layer w10: P1.5 2385,4145 2385,3901.17 2361.79,3877.96 2312.96,3877.96 2274.53,3839.53 1.55 2274.53,3421.05 2277,3418.58 2277,3311.04 2275.45,3309.49 2275.45,3229.24 2757.69,2747 3218,2747 4501.57,1463.43 S8.T1
Hazards_out: 1.23 R5.1 | length 4183.3
  Top Layer w10: v1(2215,2945) 2215.47,2945.47 1.23 ; v1(2375,2730) 3210.96,2730 4530.96,1410 4910,1410 4930,1430 4930,1600 4910,1620 4575,1620 R5.1
  Bottom Layer w10: v1(2215,2945) 2215,2845 2330,2730 v1(2375,2730)
Headlights_in: 1.54 P1.6 S11.2 | length 3572.6
  Top Layer w10: P1.6 2480,3930 2410.96,3860.96 2320,3860.96 2294.21,3835.17 1.54 2294.21,3261.43 2292.45,3259.66 2292.45,3236.29 2764.73,2764 3225.04,2764 3536.78,2452.26 4442.26,2452.26 S11.2
Horn_in: 1.52 P1.8 S9.T1 | length 4656.5
  Top Layer w10: S9.T1 -34.61,1558.43 865.97,2459 1894,2459 v1(2055,2620) ; v1(2345,3380) 2345,3382.71 2333.58,3394.12 1.52 2333.58,3818.58 2340,3825 2560,3825 2685,3950 2685,4145 P1.8
  Bottom Layer w10: v1(2055,2620) 2056.11,2620 2193,2756.89 2193,3288 2235,3330 2295,3330 v1(2345,3380)
Latch: P5.7 S13.T1 | length 1192.1
  Top Layer w10: S13.T1 2330.39,942.44 2355.91,916.93 2356.89,916.93 2603.82,670 3040,670 3181.5,528.5 P5.7
LCD_CS: 1.29 LCD1.11 | length 1435.6
  Top Layer w10: LCD1.11 1413.04,3105 v2(1955,3105) ; v2(2155,3130) 2262.53,3130 2330.8,3061.72 2330.8,3034.24 2335,3030.04 1.29
  Bottom Layer w10: v2(1955,3105) 2012,3162 2123,3162 v2(2155,3130)
LCD_RST: 1.11 LCD1.15 | length 1543.4
  Top Layer w10: v1(1185,2785) 1185,2852.92 1415.08,3083 2044.27,3083 2097,3135.73 2097,3168.93 2058.93,3207 2031.83,3207 2029.71,3204.88 2019.53,3204.88 1.11
  Bottom Layer w10: LCD1.15 1185,2562 v1(1185,2785)
LCD_SCK: 1.27 LCD1.13 | length 1410.6
  Top Layer w10: LCD1.13 1514.52,3049 2058.35,3049 2111.35,3102 2251.16,3102 2293.93,3059.22 2293.93,3028.9 1.27
LCD_SDI: 1.20 LCD1.17 | length 1546.8
  Top Layer w10: v1(1280,2720) 1280,2755 1465,2940 v1(1845,2940) ; v1(2135,2940) 2156.23,2961.23 1.20
  Bottom Layer w10: LCD1.17 1280,2499.52 v1(1280,2720) ; v1(1845,2940) 1885,2980 2095,2980 v1(2135,2940)
LCD_SDO: 1.10 LCD1.16 | length 1656.7
  Top Layer w10: v1(1220,2840) 1220,2863.88 1422.12,3066 2051.31,3066 2114,3128.69 2114,3175.97 2064.5,3225.47 1.10
  Bottom Layer w10: LCD1.16 1220,2518.26 v1(1220,2840)
LT_in: 1.59 P1.1 S14.1 | length 3159.4
  Top Layer w10: P1.1 1985,4145 1985,3950 2072,3863 2147,3863 2195.79,3814.21 1.59 2194.88,3480.47 2194.88,3440.04 2110,3355.15 v1(2110,3300)
  Bottom Layer w10: S14.1 1234.96,1684.96 1760,2210 1760,3015 2045,3300 v1(2110,3300)
LT_out: 1.25 R1.1 | length 2138.8
  Top Layer w10: R1.1 617.93,2235 917.93,2535 1881.11,2535 2253.94,2907.82 2253.94,3027.72 1.25
MC: P5.6 S12.2 | length 723
  Top Layer w10: P5.6 3299.5,815.04 3329.5,845.04 S12.2@3555,845.04
NetLED1_1: LED1.1 R2.2 | length 294.6
  Top Layer w10: LED1.1 470,3585 555,3670 R2.2
NetLED2_1: LED2.1 R1.2 | length 465
  Top Layer w10: LED2.1 R1.2
NetLED3_1: LED3.1 R3.2 | length 290
  Top Layer w10: R3.2 LED3.1
NetLED4_1: LED4.1 R4.2 | length 342.1
  Top Layer w10: R4.2 5485,2240 LED4.1
NetLED5_1: LED5.1 R5.2 | length 455
  Top Layer w10: R5.2 LED5.1
NRST_pgm15: 1.7 H2.8 | length 3023.5
  Top Layer w10: 1.7 2020.15,3283 2095.89,3283 2103.89,3275 2214,3275 v1@2222,3283 ; v1(2355,3285) 2414.83,3344.83 2414.83,3503.88 2795.96,3885 v1(3100,3885) ; v1(3270,3885) 3281.11,3885 3295,3898.89 3295,4910 3310,4925 3570,4925 H2.8
  Bottom Layer w10: v1(2230,3280) 2347.29,3280 2352.29,3285 v1(2355,3285) ; v1(3100,3885) v1(3270,3885)
Power: P5.8 S6.2 | length 1709.9
  Top Layer w10: S6.2@1655,845.04 2009.96,845.04 2085,770 2215,640 2955,640 3063.5,531.5 P5.8
Regen_in: 1.53 P1.7 S2.T1 | length 4071.7
  Top Layer w10: v1(2314.45,3250.55) 2313.9,3251.1 1.53 2313.9,3828.9 2328.96,3843.96 2478.96,3843.96 2585,3950 2585,4145 P1.7 ; v1(3380,3050) 3426.56,3003.44 4991.39,3003.44 5125.39,3137.44 S2.T1
  Bottom Layer w10: v1(2314.45,3250.55) 2430,3135 3295,3135 v1(3380,3050)
Regen_out: 1.24 R3.1 | length 2952.9
  Top Layer w10: v1(2235,3080) 2235.08,3079.92 2235.08,3028.7 1.24 ; v1(3245,3085) 4795,3085 4890,3180 R3.1
  Bottom Layer w10: v1(2235,3080) 2240,3085 v1(3245,3085)
Reserved0: 1.51 P1.9 | length 1017.3
  Top Layer w10: 1.51@2354.17,3482.28 1.51 2353.27,3802.41 2355.86,3805 2640,3805 2785,3950 2785,4145 P1.9
Reverse: H1.4 S1.2 | length 3525.5
  Top Layer w10: H1.4 1787,5000 2345,5000 2465,4880 2465,4700 v1(3080,4085) ; v1(3655,4080) 3930,4080 4500,3510 S1.2
  Bottom Layer w10: v1(3080,4085) 3082.71,4085 3087.71,4080 v1(3655,4080)
RT_in: 1.58 P1.2 S14.3 | length 2951.2
  Top Layer w10: P1.2 2085,4145 2085,3900 2105,3880 2160,3880 2215.47,3824.53 1.58 2215.47,3436.58 2155,3376.11 v1(2155,3305)
  Bottom Layer w10: S14.3 1605.04,2010.04 1800,2205 1800,2981.11 2078.89,3260 2108.69,3260 2153.69,3305 v1(2155,3305) v1@2156.25,3303.75
RT_out: 1.37 R4.1 | length 3133.7
  Top Layer w10: 1.37 2538.9,3186.1 2793.56,2931.44 4778.56,2931.44 4850,2860 R4.1
Rx: 1.44 U1.4 | length 619.9
  Top Layer w10: 1.44 2539.05,3323.9 2555.15,3340 2725,3340 2785,3400 2908.65,3400 2913.65,3395 U1.4 3057.72,3395
StdBy: P5.9 S4.2 | length 2478.6
  Top Layer w10: S4.2 1409.96,845.04 1475,780 1475,590 1515,550 2885,550 2945.5,489.5 P5.9
SWCLK_pgm9: 1.49 H2.5 | length 2158
  Top Layer w10: 1.49 2392.64,3504.02 2397.83,3509.21 2397.83,3510.92 2801.92,3915 v1(3130,3915) ; v1(3260,3955) 3260,4915 H2.5
  Bottom Layer w10: v1(3130,3915) 3220,3915 v1(3260,3955)
SWDIO_pgm7: 1.46 H2.4 | length 2263.2
  Top Layer w10: 1.46 2470.47,3364.17 2440.15,3364.17 2440.15,3366.05 2438.28,3366.05 2431.83,3372.49 2431.83,3496.83 2785,3850 v1(3135,3850) ; v1(3220,3850) 3221.91,3851.91 3221.91,3858.62 3221.97,3858.68 3223,4978 H2.4
  Bottom Layer w10: v1(3135,3850) v1(3220,3850)
Throttle_in: P2.2
Tx: 1.45 U1.1 | length 669.8
  Top Layer w10: 1.45 2534.69,3343.58 2551.11,3360 2720,3360 2905,3545 U1.1 3057.72,3545
pads on no net: 1.1 1.2 1.3 1.4 1.5 1.6 1.14 1.15 1.16 1.17 1.21 1.22 1.26 1.28 1.30 1.33 1.34 1.35 1.36 1.38 1.39 1.40 1.41 1.42 1.43 1.50 1.61 1.62 H1.5 H1.6 H1.P$1 H1.P$2 LCD1.1 LCD1.12 LCD1.14 LCD1.18 LCD1.23 LCD1.24 LCD1.25 LCD1.26 LCD1.27 LCD1.28 LCD1.30 LCD1.40 P5.1 P5.2 P5.3 P5.4 P5.P$1 P5.P$2 S2.T2 S2.T4 S3.T2 S3.T4 S7.T2 S7.T4 S8.T2 S8.T4 S9.T2 S9.T4 S10.T2 S10.T4 S13.T2 S13.T4 U1.5
copper on no net: | length 1.3
  Top Layer w10: 2273.62,3027.72 2274.53,3028.62

## Polygon pours and split planes (outlines as drawn)
GND on Bottom Layer "GND_L02_P094" (hatched Horizontal grid 20 track 8, pour order 94): -430,775 -517.5,980.92 cw(c4118.9,2652.2) -534.69,4275 630,4275 1165,4810 1165,5290 4075,5290 4075,4810 4610,4275 5767.3,4275 5799.8,4184.93 cw(c1428.08,2643.91) 5670,775 4870,775 4490,395 4490,0 750,0 750,380 355,775
GND on Bottom Layer "NONET_L02_P092" (hatched Horizontal grid 20 track 8, shelved, pour order 92): 750,0 750,380 355,775 -446.35,775 cw(c4055.69,2651.51) -543.65,4275 630,4275 1165,4810 1165,5290 4075,5290 4075,4810 4610,4275 5767.3,4275 cw(c1403.67,2644.96) 5670,775 4870,775 4490,395 4490,0
GND on Bottom Layer "NONET_L02_P064" (hatched 90Degree grid 20 track 8, remove dead copper, shelved, pour order 64): -4.77,-1.55 cw(c3849,2645) -533.85,4271.78 cw(c-530,4275) -530.81,4279.95 cw(c3849,2645) -4.77,5291.55 cw(c0,5290) 0,5295.02 5240,5295.02 cw(c5240,5290) 5244.77,5291.55 cw(c1391,2645) 5770.81,4279.95 cw(c5770,4275) 5775.02,4275 cw(c5770,4275) 5773.85,4271.78 cw(c1391,2645) 6066.02,2645 cw(c1391,2645) 5244.77,-1.55 cw(c5240,0) 5240,-5.02 0,-5.02 cw(c0,0)
no net on Top Layer "NONET_L01_P096" (hatched Horizontal grid 20 track 8, pour order 96): -527.3,4275 630,4275 1165,4810 1165,5290 4075,5290 4075,4810 4610,4275 5767.3,4275 cw(c1455.03,2643.22) 5670.25,775 4870,775 4490,395 4490,0 750,0 750,380 355,775 -430,775 cw(c3836.35,2644.96)
no net on Top Layer "NONET_L01_P086" (hatched Horizontal grid 20 track 8, shelved, pour order 86): 5335,2465
no net on Top Layer "NONET_L01_P084" (hatched 90Degree grid 20 track 8, shelved, pour order 84): -0.12,0.12 0.25,0.48 cw(c3853.37,2645.24) 0.25,5290 5239.71,5290 cw(c1385.77,2644.97) 5239.83,0.12
no net on Top Layer "Top Layer-No Net" (hatched 90Degree grid 20 track 8, shelved, pour order 82): -0.12,0.12 cw(c3855.64,2644.87) -0.12,5289.63 0.25,5290 5239.83,5289.88 cw(c1386.83,2645) 5239.83,0.12
no net on Top Layer "Top Layer-No Net 1" (solid, shelved, pour order 74): 125,270
no net on Top Layer "NONET_L01_P066" (hatched 90Degree grid 20 track 8, shelved, pour order 66): -4.77,-1.55 cw(c3849,2645) -533.85,4271.78 cw(c-530,4275) -530.81,4279.95 cw(c3849,2645) -4.77,5291.55 cw(c0,5290) 0,5295.02 5240,5295.02 cw(c5240,5290) 5244.77,5291.55 cw(c1391,2645) 5770.81,4279.95 cw(c5770,4275) 5775.02,4275 cw(c5770,4275) 5773.85,4271.78 cw(c1391,2645) 6066.02,2645 cw(c1391,2645) 5244.77,-1.55 cw(c5240,0) 5240,-5.02 0,-5.02 cw(c0,0)

## Keep-outs
Keep-Out Layer:
  lines w10: -530,4275 630,4275 1165,4810 1165,5290 ; -430,775 355,775 750,380 750,0 ; -280,775 -275,775 ; 0,0 5240,0 ; 0,5290 5240,5290 ; 0.17,0.12 cw(c3849,2645) 0.25,5290 ; 4075,5290 4075,4810 4610,4275 5770,4275 ; 4490,0 4490,395 4595,500 4775,680 4817.5,722.5 4870,775 5670,775 ; 5239.83,0.12 ccw(c1391,2645) 5239.83,5289.88

## Other copper
Top Layer:
  pour cut-out: -527.3,4275 630,4275 1165,4810 1165,5290 -70,5290 -220,5140
  pour cut-out: -430,775 355,775 750,380 750,0 -0.12,0.12 -315,315
  pour cut-out: 5234.83,5.12 4485,5 4485,390 4755,660 4875,780 5665,780 5655,770 5655,595
  pour cut-out: 4075,5290 4075,4810 4610,4275 5770.63,4275 5770,4275.63 5770,4835 5694.71,4835 5239.83,5289.88

## Silkscreen, mask and mechanical layers (free items; w line width, h text height)
Top Overlay:
  drawing of 2672 lines, arcs and shapes, not listed
  text "3V3" at 1350,4880 h30 r270
  text "Cruise_in" at 1475,4880 h30 r270
  text "5V" at 1595,4875 h30 r270
  text "Reverse" at 1715,4875 h30 r270
  text "CANH" at 2065,4875 h30 r270
  text "CANL" at 2185,4875 h30 r270
  text "GND" at 2305,4875 h30 r270
  text "AUX_SteeringWheel_V6" at 4185,4805 h60
  text "LT_in" at 1960,4091.17 h30 r270
  text "RT_in" at 2065,4091.17 h30 r270
  text "CPlus_in" at 2165,4091.17 h30 r270
  text "CMinus_in" at 2265,4091.17 h30 r270
  text "Hazards_in" at 2365,4091.17 h30 r270
  text "Headlights_in" at 2460,4091.17 h30 r270
  text "Regen_in" at 2560,4091.17 h30 r270
  text "Horn_in" at 2665,4091.17 h30 r270
  text "Reserved0" at 2770,4091.17 h30 r270
  text "Throttle Header" at 5370,4090 h30
  text "GND" at 5280,3990 h30
  text "Cruise_out" at 700,3885 h30
  text "Throttle_in" at 5060,3885 h30
  text "Reverse" at 4270,3830 h60
  text "CPlus_in" at -660,3780 h30
  text "GND" at 1950,3730 h30
  text "3V3" at 2060,3730 h30
  text "Cruise Control" at 195,3715 h60
  text "5V" at 4660,3680 h30
  text "5V" at 4105,3575 h30
  text "GND" at 225,3560 h30
  text "3V3" at -615,3520 h30
  text "GND" at 4105,3505 h30
  text "GND" at 950,3500 h30
  text "Reverse" at 4655,3480 h30
  text "Regen Braking" at 4960,3445 h60
  text "3V3" at 2735,3390 h30
  text "GND" at 5625,3365 h30
  text "Cruise_in" at 0,3325 h30
  text "GND" at 4650,3310 h30
  text "R3" at 5155,3300 h30
  text "Regen_out" at 4835,3290 h30
  text "GND" at 2735,3285 h30
  text "Cruise +" at -425,3260 h60
  text "GND" at 1680,3245 h30
  text "3V3" at 1680,3145 h30
  text "Cruise -" at -420,3135 h60
  text "Regen_in" at 4830,3110 h30
  text "3V3" at 175,3090 h30
  text "3V3" at 4105,2945 h30
  text "3V3" at 4970,2915 h30
  text "GND" at 950,2870 h30
  text "CMinus_in" at -765,2860 h30
  text "Headlights" at 4215,2825 h60
  text "GND" at 4105,2800 h30
  text "CS" at 980,2795 h30
  text "GND" at 2280,2750 h30
  text "3V3" at 2400,2750 h30
  text "GND" at 1920,2745 h30
  text "3V3" at 2030,2745 h30
  text "3V3" at -600,2680 h30
  text "3V3" at 4645,2650 h30
  text "SCK" at 950,2630 h30
  text "RST" at 950,2470 h30
  text "Headlights_in" at 4645,2470 h30
  text "SDO" at 950,2395 h30
  text "SDI" at 960,2320 h30
  text "GND" at -435,2300 h30
  text "RT_out" at 4905,2290 h30
  text "LT_out" at 425,2280 h30
  text "GND" at 4645,2280 h30
  text "GND" at 5625,2190 h30
  text "GND" at 950,2170 h30
  text "GND" at 4105,2160 h30
  text "3V3" at 950,2080 h30
  text "Left / Signal" at -780,2075 h60
  text "Right / Signal" at 5545,2070 h60
  text "Hazards" at 4945,1825 h60
  text "Hazards_out" at 4455,1775 h30
  text "Horn" at -45,1760 h60
  text "GND" at 5370,1705 h30
  text "Horn_in" at -460,1535 h30
  text "RIGHT" at 1740,1510 h60
  text "LEFT" at 855,1500 h60
  text "Hazards_in" at 4525,1440 h30
  text "3V3" at -355,1340 h30
  text "3V3" at 4710,1235 h30
  text "Eco" at 4245,1220 h60
  text "Latch" at 2435,1210 h60
  text "Power" at 1495,1195 h60
  text "Standby" at 630,1185 h60
  text "Motor / Controller" at 3310,1180 h60
  text "5V" at 625,1015 h30
  text "5V" at 4125,1015 h30
  text "5V" at 3335,1010 h30
  text "5V" at 1425,1005 h30
  text "Latch" at 2130,935 h30
  text "Eco" at 4105,825 h30
  text "StdBy" at 545,820 h30
  text "Power" at 1345,820 h30
  text "MC" at 3330,810 h30
  text "3V3" at 2160,725 h30
  text "GND" at 3315,640 h30
  text "GND" at 595,635 h30
  text "GND" at 1405,635 h30
  text "GND" at 4100,635 h30
  text "Latch" at 3165,565 h30 r270
  text "StdBy" at 2920,560 h30 r270
  text "Power" at 3050,560 h30 r270
  text "Eco" at 3405,510 h30 r270
  text "MC" at 3280,480 h30 r270

## Text inside footprints (layer, text, board x,y; h text height)
H2: Top Overlay "20" at 3905,5080 h50; Top Overlay "10" at 3905,4980 h50; Top Overlay "1" at 2865,5080 h50; Top Overlay "1" at 2825,5080 h50; Top Overlay "1" at 2865,4960 h50
U1: Top Overlay "STM46" at 2808.61,3540 h21.65; Top Overlay "GND" at 2808.61,3490 h21.65; Top Overlay "5V VCC" at 2808.61,3440 h21.65; Top Overlay "NC" at 3175,3335 h21.65; Top Overlay "CANL" at 3258.61,3390 h21.65 r90; Top Overlay "CANH" at 3258.61,3485 h21.65 r90; Top Overlay "GND" at 3163.61,3585 h21.65; Top Overlay "STM45" at 2808.61,3390 h21.65